# EAGLE board nokia (EAGLE 5.06)
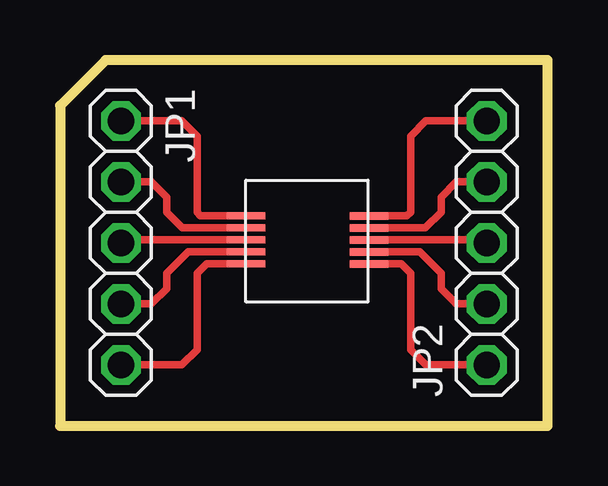
[diagram p0: board, top side]

Size 20.32 x 15.24 mm. Coordinates in mm from the lower left corner, seen from the top.
Outline: 0,0 20.32,0 20.32,15.24 1.91,15.24 0,13.34 0,0
Copper layers (1*16): Top 0.035mm / dielectric 1.5mm / Bottom 0.035mm
Design rules "default": minimum track width 10mil, minimum drill 24mil, track to track 8mil, track to pad 8mil, pad to pad 8mil, via to via 8mil, smd to smd 8mil, copper to edge 40mil, drill to drill 8mil, minimum pad ring 10mil, minimum via ring 8mil, stop-mask expansion 4mil, vias tented up to drill 0mil, thermal gap 10mil

## Footprints (pad centres in the part's own frame; a part is rotated, then mirrored left to right if it is on the bottom)
1X05 = drill 1.1 octagon: 1 -5.08,0; 2 -2.54,0; 3 0,0; 4 2.54,0; 5 5.08,0
NOKIA6100_LCD_SMALL = smd 1.6 x 0.3: 1 -2.415,1.131; 2 -2.415,0.631; 3 -2.415,0.131; 4 -2.415,-0.369; 5 -2.415,-0.869; 6 2.719,-0.877; 7 2.719,-0.377; 8 2.719,0.123; 9 2.719,0.623; 10 2.719,1.123

## Placement (x,y rotation side)
JP1  [1X05]  2.54,7.62 270 top
JP2  [1X05]  17.78,7.62 90 top
U$1  NOKIA6100_LCD_SMALL  [NOKIA6100_LCD_SMALL]  10.16,7.62 0 top

## Library data of the parts
JP1 JP2 = nokia
U$1 = nokia_6100

## Nets
1: JP1.1 U$1.1
2: JP1.2 U$1.2
3: JP1.3 U$1.3
4: JP1.4 U$1.4
5: JP1.5 U$1.5
6: JP2.1 U$1.6
7: JP2.2 U$1.7
8: JP2.3 U$1.8
9: JP2.4 U$1.9
10: JP2.5 U$1.10

## Tracks (layer width: path | path; a pad name or v marks a point on that pad's centre or on a via)
1
  Top 0.305: U$1.1 5.85,8.75 5.71,8.89 5.71,12.06 5.08,12.7 JP1.1
2
  Top 0.305: U$1.2 5.08,8.25 4.45,8.89 4.45,9.53 3.81,10.16 JP1.2
3
  Top 0.305: U$1.3 2.67,7.75 JP1.3
4
  Top 0.305: U$1.4 5.35,7.25 4.45,6.35 4.45,5.71 3.81,5.08 JP1.4
5
  Top 0.305: U$1.5 6.12,6.75 5.71,6.35 5.71,3.17 5.08,2.54 JP1.5
6
  Top 0.305: U$1.6 14.21,6.74 14.61,6.35 14.61,3.17 15.24,2.54 JP2.1
7
  Top 0.305: U$1.7 14.98,7.24 15.88,6.35 15.88,5.71 16.51,5.08 JP2.2
8
  Top 0.305: U$1.8 17.66,7.74 JP2.3
9
  Top 0.305: U$1.9 15.23,8.24 15.88,8.89 15.88,9.53 16.51,10.16 JP2.4
10
  Top 0.305: U$1.10 14.46,8.74 14.61,8.89 14.61,12.06 15.24,12.7 JP2.5